# EAGLE board 2 PCB (EAGLE 6.1)
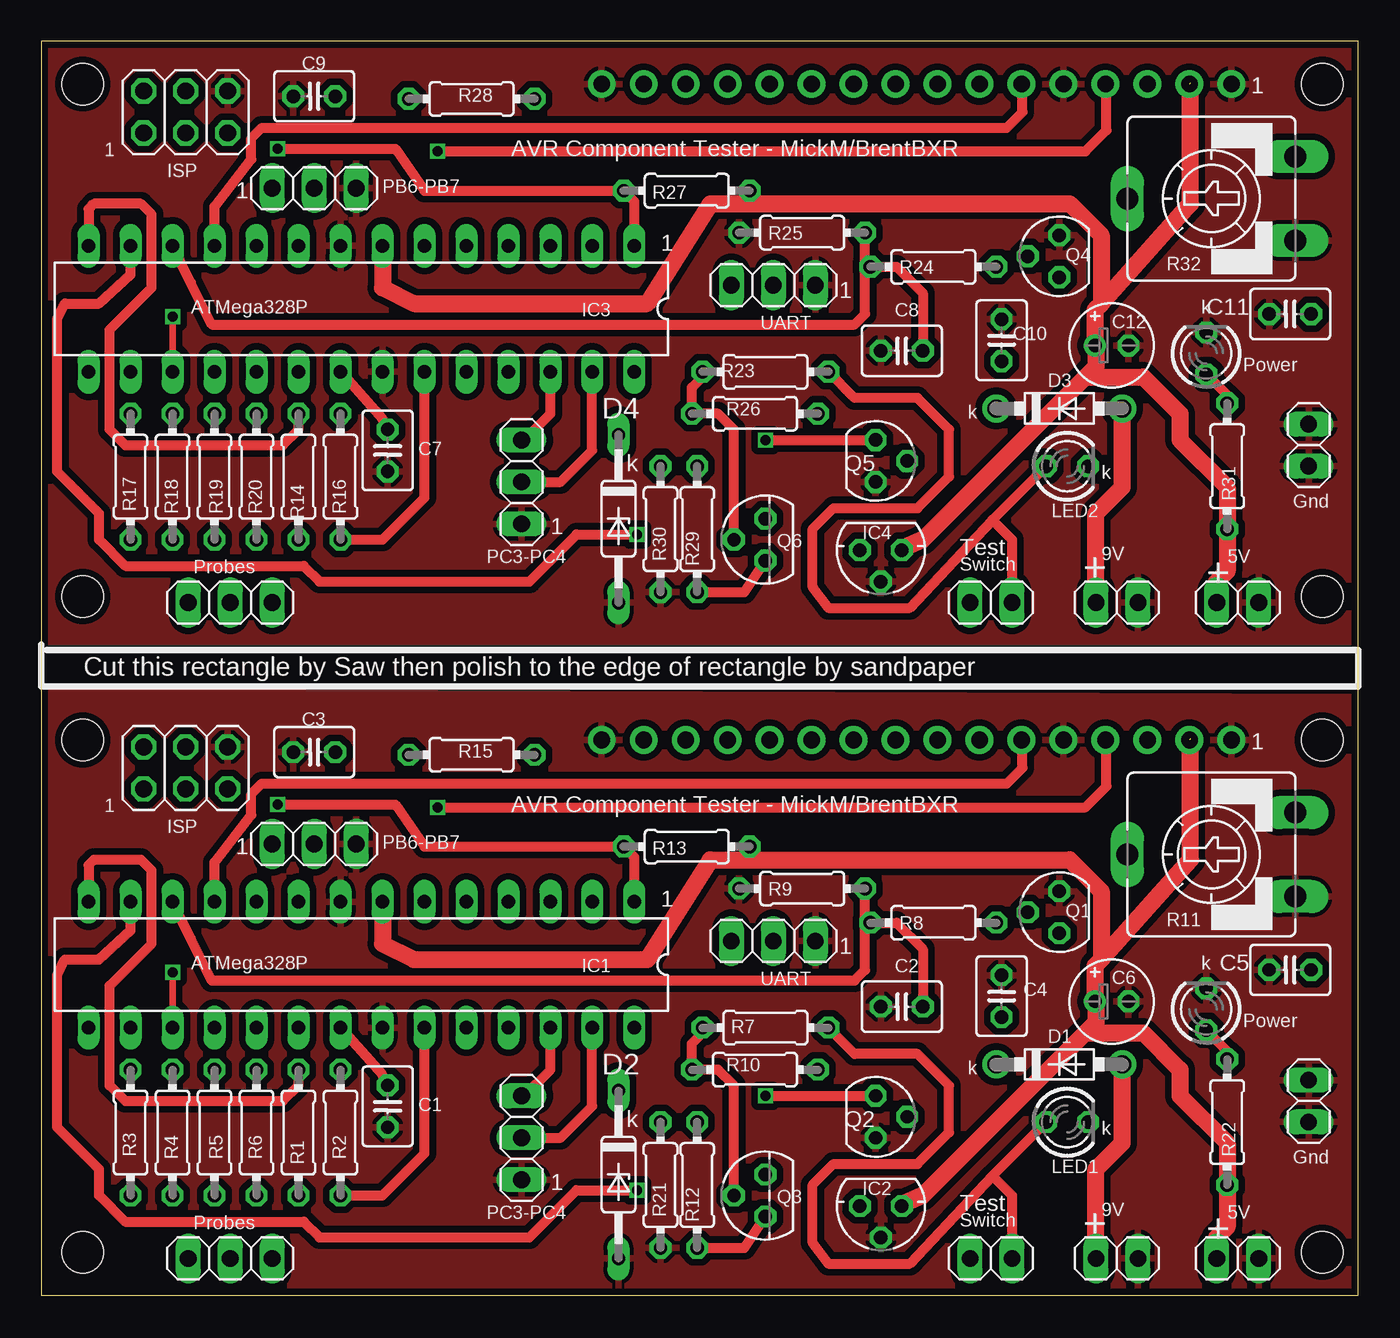
[diagram p0: board, top side]
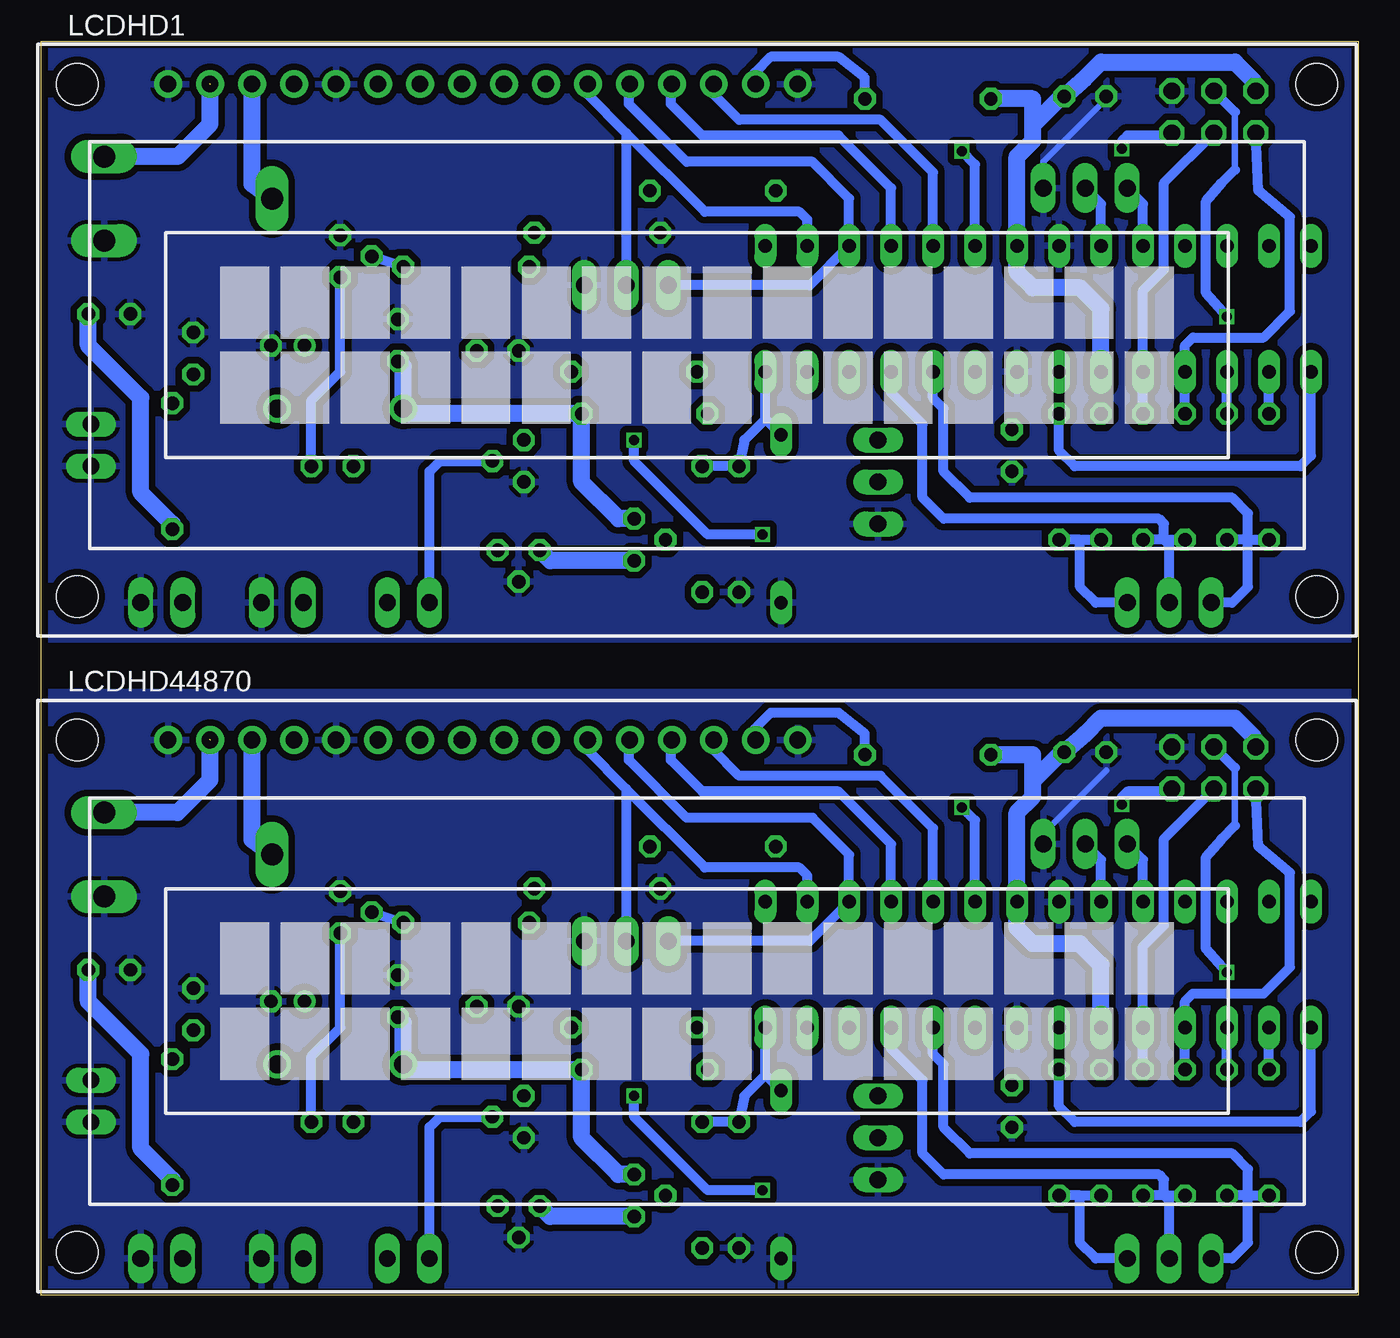
[diagram p1: board, bottom side, seen from below]

Size 79.68 x 75.87 mm. Coordinates in mm from the lower left corner, seen from the top.
Outline: 0,0 79.68,0 79.68,75.87 0,75.87 0,0
Copper layers (1*16): Top 0.035mm / dielectric 1.5mm / Bottom 0.035mm
Design rules: minimum track width 6mil, minimum drill 12mil, track to track 10mil, track to pad 10mil, pad to pad 10mil, via to via 10mil, smd to smd 0mil, copper to edge 10mil, drill to drill 10mil, minimum pad ring 10mil, minimum via ring 6mil, stop-mask expansion 2mil, vias tented up to drill 100mil, thermal gap 10mil

## Footprints (pad centres in the part's own frame; a part is rotated, then mirrored left to right if it is on the bottom)
1X02 = drill 1.016 long: 1 -1.27,0; 2 1.27,0
C025-030X050 = drill 0.813 octagon: 1 -1.27,0; 2 1.27,0
E2-5 = drill 0.813 pad 1.27: + -1.016,0 | drill 0.813 pad 1.27 octagon: - 1.016,0
DO41-7.6 = drill 1.1 pad 1.7: A 3.81,0; C -3.81,0
DO35Z10 = drill 0.813 long: A 5.08,0; C -5.08,0
DIL28-3 = drill 0.813 long: 1 -16.51,-3.81; 2 -13.97,-3.81; 3 -11.43,-3.81; 4 -8.89,-3.81; 5 -6.35,-3.81; 6 -3.81,-3.81; 7 -1.27,-3.81; 8 1.27,-3.81; 9 3.81,-3.81; 10 6.35,-3.81; 11 8.89,-3.81; 12 11.43,-3.81; 13 13.97,-3.81; 14 16.51,-3.81; 15 16.51,3.81; 16 13.97,3.81; 17 11.43,3.81; 18 8.89,3.81; 19 6.35,3.81; 20 3.81,3.81; 21 1.27,3.81; 22 -1.27,3.81; 23 -3.81,3.81; 24 -6.35,3.81; 25 -8.89,3.81; 26 -11.43,3.81; 27 -13.97,3.81; 28 -16.51,3.81
78LXX = drill 0.813 octagon: GND 0,1.905; IN 1.27,0; OUT -1.27,0
2X03 = drill 1.016 octagon: 1 -2.54,-1.27; 2 -2.54,1.27; 3 0,-1.27; 4 0,1.27; 5 2.54,-1.27; 6 2.54,1.27
TUXGR_16X2_R2 = drill 1 pad 1.676: 1 -32,15.5; 2 -29.46,15.5; 3 -26.92,15.5; 4 -24.38,15.5; 5 -21.84,15.5; 6 -19.3,15.5; 7 -16.76,15.5; 8 -14.22,15.5; 9 -11.68,15.5; 10 -9.14,15.5; 11 -6.6,15.5; 12 -4.06,15.5; 13 -1.52,15.5; 14 1.02,15.5; 15 3.56,15.5; 16 6.1,15.5 | hole 2.5: -37.5,-15.5; 37.5,-15.5; -37.5,15.5; 37.5,15.5
LED3MM = drill 0.813 octagon: A -1.27,0; K 1.27,0
1X03 = drill 1.016 long: 1 -2.54,0; 2 0,0; 3 2.54,0
SOT54A = drill 0.813 octagon: B 0,1.905; C -1.27,0; E 1.27,0
TO92 = drill 0.813 octagon: 1 1.27,0; 2 0,1.905; 3 -1.27,0
0204/7 = drill 0.813 octagon: 1 -3.81,0; 2 3.81,0
CA9V = drill 1.321 long: A -2.54,-5.08; E 2.54,-5.08; S 0,5.08

## Placement (x,y rotation side)
9V-DC-IN  [1X02]  65.09,2.22 0 top
9V-DC-IN1  [1X02]  65.09,41.91 0 top
C1  100n  [C025-030X050]  20.96,11.43 270 top
C2  100nF  [C025-030X050]  52.07,17.46 180 top
C3  100n  [C025-030X050]  16.51,32.86 180 top
C4  100n  [C025-030X050]  58.1,18.1 90 top
C5  100n  [C025-030X050]  75.57,19.69 180 top
C6  100uF  [E2-5]  64.77,17.78 0 top
C7  100n  [C025-030X050]  20.96,51.12 270 top
C8  100nF  [C025-030X050]  52.07,57.15 180 top
C9  100n  [C025-030X050]  16.51,72.55 180 top
C10  100n  [C025-030X050]  58.1,57.78 90 top
C11  100n  [C025-030X050]  75.57,59.37 180 top
C12  100uF  [E2-5]  64.77,57.47 0 top
D1  1N5817-B  [DO41-7.6]  61.59,13.97 0 top
D2  5V1  [DO35Z10]  34.92,7.3 270 top
D3  1N5817-B  [DO41-7.6]  61.59,53.66 0 top
D4  5V1  [DO35Z10]  34.92,46.99 270 top
GND  [1X02]  76.68,11.75 90 top
GND1  [1X02]  76.68,51.43 90 top
IC1  MEGA8-P  [DIL28-3]  19.37,20 180 top
IC2  7805L  [78LXX]  50.8,5.4 180 top
IC3  MEGA8-P  [DIL28-3]  19.37,59.69 180 top
IC4  7805L  [78LXX]  50.8,45.09 180 top
ISP  [2X03]  8.73,31.91 0 top
ISP1  [2X03]  8.73,71.6 0 top
LCDHD1  TUXGR_16X2_R2  [TUXGR_16X2_R2]  40,57.78 0 bottom
LCDHD44870  TUXGR_16X2_R2  [TUXGR_16X2_R2]  40,18.1 0 bottom
LED1  LED  [LED3MM]  62.07,10.48 0 top
LED2  LED  [LED3MM]  62.07,50.16 0 top
PB6-PB1  [1X03]  16.51,66.99 0 top
PB6-PB7  [1X03]  16.51,27.31 0 top
PC3-PC1  [1X03]  29.05,49.21 90 top
PC3-PC4  [1X03]  29.05,9.52 90 top
PROBES  [1X03]  11.43,2.22 0 top
PROBES1  [1X03]  11.43,41.91 0 top
PWR  LED  [LED3MM]  70.49,17.3 90 top
PWR1  LED  [LED3MM]  70.49,56.99 90 top
Q1  BC547  [SOT54A]  61.59,23.18 90 top
Q2  BC547  [SOT54A]  50.48,10.79 270 top
Q3  BC557  [TO92]  43.81,6.03 90 top
Q4  BC547  [SOT54A]  61.59,62.86 90 top
Q5  BC547  [SOT54A]  50.48,50.48 270 top
Q6  BC557  [TO92]  43.81,45.72 90 top
R1  750R  [0204/7]  15.56,9.84 270 top
R2  500K  [0204/7]  18.1,9.84 270 top
R3  750R  [0204/7]  5.4,9.84 270 top
R4  500K  [0204/7]  7.94,9.84 270 top
R5  750R  [0204/7]  10.48,9.84 270 top
R6  500K  [0204/7]  13.02,9.84 270 top
R7  27k  [0204/7]  43.81,16.19 180 top
R8  27K  [0204/7]  53.97,22.54 0 top
R9  100K  [0204/7]  46.04,24.61 0 top
R10  33K  [0204/7]  43.18,13.65 0 top
R11  10K  [CA9V]  70.8,26.67 90 top
R12  10K  [0204/7]  39.69,6.67 90 top
R13  10K  [0204/7]  39.05,27.15 180 top
R14  750R  [0204/7]  15.56,49.53 270 top
R15  150R  [0204/7]  26.04,32.7 180 top
R16  500K  [0204/7]  18.1,49.53 270 top
R17  750R  [0204/7]  5.4,49.53 270 top
R18  500K  [0204/7]  7.94,49.53 270 top
R19  750R  [0204/7]  10.48,49.53 270 top
R20  500K  [0204/7]  13.02,49.53 270 top
R21  3K3  [0204/7]  37.46,6.67 270 top
R22  680R  [0204/7]  71.76,10.48 90 top
R23  27k  [0204/7]  43.81,55.88 180 top
R24  27K  [0204/7]  53.97,62.23 0 top
R25  100K  [0204/7]  46.04,64.29 0 top
R26  33K  [0204/7]  43.18,53.34 0 top
R27  10K  [0204/7]  39.05,66.83 180 top
R28  150R  [0204/7]  26.04,72.39 180 top
R29  10K  [0204/7]  39.69,46.35 90 top
R30  3K3  [0204/7]  37.46,46.35 270 top
R31  680R  [0204/7]  71.76,50.16 90 top
R32  10K  [CA9V]  70.8,66.36 90 top
TEST-SWITCH  [1X02]  57.47,2.22 0 top
TEST-SWITCH1  [1X02]  57.47,41.91 0 top
UART  [1X03]  44.29,21.43 180 top
UART1  [1X03]  44.29,61.12 180 top
VCC-GND  [1X02]  72.39,2.22 0 top
VCC-GND1  [1X02]  72.39,41.91 0 top

## Library data of the parts
9V-DC-IN 9V-DC-IN1 GND GND1 ISP ISP1 PB6-PB1 PB6-PB7 PC3-PC1 PC3-PC4 PROBES PROBES1 TEST-SWITCH TEST-SWITCH1 UART UART1 VCC-GND VCC-GND1 = pinhead
C1-C12 R1-R10 R12-R31 = rcl
D1-D4 = diode
IC1 IC3 = atmel; OC_FARNELL: unknown; OC_NEWARK: unknown
IC2 IC4 = v-reg
LCDHD1 LCDHD44870 = display-lcd; OC_FARNELL: unknown; OC_NEWARK: unknown
LED1 LED2 PWR PWR1 = led
Q1 Q2 Q4 Q5 = transistor-small-signal
Q3 Q6 = transistor-pnp
R11 R32 = pot

## Nets
+5V: C3.1 C5.1 C6.+ IC1.7 IC1.20 IC2.OUT ISP.2 LCDHD44870.2 R11.E R13.1 R15.2 R22.1 VCC-GND.1
+5V1: C9.1 C11.1 C12.+ IC3.7 IC3.20 IC4.OUT ISP1.2 LCDHD1.2 R27.1 R28.2 R31.1 R32.E VCC-GND1.1
BAT-MON: D2.C IC1.28 R12.2 R21.1
BAT-MON1: D4.C IC3.28 R29.2 R30.1
GND: 9V-DC-IN.2 C1.2 C2.2 C3.2 C4.2 C5.2 C6.- D2.A GND.1 GND.2 IC1.8 IC1.22 IC2.GND ISP.6 LCDHD44870.1 LCDHD44870.5 LCDHD44870.16 PB6-PB7.3 PC3-PC4.1 PWR.K Q1.E Q2.E R9.1 R11.A R21.2 UART.1 VCC-GND.2
GND1: 9V-DC-IN1.2 C7.2 C8.2 C9.2 C10.2 C11.2 C12.- D4.A GND1.1 GND1.2 IC3.8 IC3.22 IC4.GND ISP1.6 LCDHD1.1 LCDHD1.5 LCDHD1.16 PB6-PB1.3 PC3-PC1.1 PWR1.K Q4.E Q5.E R25.1 R30.2 R32.A UART1.1 VCC-GND1.2
MISO: IC1.18 ISP.1 R5.1
MISO1: IC3.18 ISP1.1 R19.1
MOSI: IC1.17 ISP.4 R4.1
MOSI1: IC3.17 ISP1.4 R18.1
N$1: IC2.IN Q3.3 R12.1
N$2: 9V-DC-IN.1 D1.A
N$3: IC1.23 PROBES.3 R1.2 R2.2
N$4: IC1.13 Q2.C
N$5: IC1.25 PROBES.2 R5.2 R6.2
N$6: IC1.14 R1.1
N$7: IC1.15 R2.1
N$8: IC1.16 R3.1
N$9: PWR.A R22.2
N$10: IC3.23 PROBES1.3 R14.2 R16.2
N$11: IC3.14 R14.1
N$12: Q3.2 R7.2 R10.1
N$13: IC1.6 LCDHD44870.4
N$14: IC3.15 R16.1
N$15: IC1.24 PROBES.1 R3.2 R4.2
N$16: Q1.B R8.2
N$17: IC3.16 R17.1
N$18: IC3.24 PROBES1.1 R17.2 R18.2
N$19: IC1.9 PB6-PB7.2
N$20: LED1.A R7.1 TEST-SWITCH.2
N$21: LED1.K Q1.C
N$22: Q2.B TEST-SWITCH.1
N$23: C2.1 IC1.12 R8.1 R9.2
N$24: IC1.11 LCDHD44870.6
N$25: Q6.2 R23.2 R26.1
N$26: IC1.4 LCDHD44870.13
N$27: IC1.5 LCDHD44870.14
N$28: LCDHD44870.3 R11.S
N$29: C1.1 IC1.21
N$30: IC1.10 PB6-PB7.1
N$31: LCDHD44870.15 R15.1
N$32: Q4.B R24.2
N$33: C4.1 D1.C Q3.1 R10.2
N$34: IC1.26 PC3-PC4.3
N$35: LED2.A R23.1 TEST-SWITCH1.2
N$36: LED2.K Q4.C
N$37: IC1.27 PC3-PC4.2
N$38: Q5.B TEST-SWITCH1.1
N$39: IC3.6 LCDHD1.4
N$40: IC3.4 LCDHD1.13
N$41: IC3.5 LCDHD1.14
N$42: IC3.11 LCDHD1.6
N$43: LCDHD1.15 R28.1
N$44: C10.1 D3.C Q6.1 R26.2
N$45: LCDHD1.3 R32.S
N$46: 9V-DC-IN1.1 D3.A
N$47: C7.1 IC3.21
N$48: C8.1 IC3.12 R24.1 R25.2
N$49: IC4.IN Q6.3 R29.1
N$50: IC3.26 PC3-PC1.3
N$51: IC3.27 PC3-PC1.2
N$52: IC3.9 PB6-PB1.2
N$53: IC3.10 PB6-PB1.1
N$54: IC3.25 PROBES1.2 R19.2 R20.2
N$55: PWR1.A R31.2
N$56: IC3.13 Q5.C
RST: IC1.1 ISP.5 R13.2
RST1: IC3.1 ISP1.5 R27.2
RXD: IC1.2 LCDHD44870.11 UART.2
RXD1: IC3.2 LCDHD1.11 UART1.2
SCK: IC1.19 ISP.3 R6.1
SCK1: IC3.19 ISP1.3 R20.1
TXD: IC1.3 LCDHD44870.12 UART.3
TXD1: IC3.3 LCDHD1.12 UART1.3

## Tracks (layer width: path | path; a pad name or v marks a point on that pad's centre or on a via)
+5V  (1 unrouted)
  Top 0.406: 43.02,26.35 42.86,26.51 | C6.+ 63.82,17.72
  Top 0.61: 42.86,26.51 R13.1
  Top 1.016: IC1.7 20.64,21.27 22.54,20.32 36.67,20.32 40.48,26.35 43.02,26.35 62.23,26.35 64.14,24.45 64.14,20.32 | IC2.OUT 51.91,5.4 53.34,6.03 63.18,15.87 | VCC-GND.1 71.12,3.49 71.75,4.13 R22.1 71.76,9.21 68.9,12.07 68.9,13.65 66.68,15.87 63.18,15.87 | 64.14,20.32 69.53,26.35 69.53,33.65 | 63.18,15.87 63.82,16.51 63.82,17.72 | C6.+ 63.75,19.94 64.14,20.32
  Bottom 0.406: C5.1
  Bottom 0.61: 17.94,32.86 C3.1
  Bottom 1.016: IC1.20 15.56,20 16.83,21.27 19.69,21.27 20.64,22.23 IC1.7 20.64,29.21 19.69,30.16 19.69,31.12 | R15.2 19.69,32.7 19.69,31.12 | ISP.2 6.35,33.81 7.46,34.92 15.56,34.92 16.51,33.97 C3.1 | LCDHD44870.2 69.46,31.18 71.44,29.21 R11.E | C5.1 76.84,17.78 73.66,14.6 73.66,8.89 71.76,6.99 R22.1 | 19.69,31.12 17.94,32.86
+5V1  (1 unrouted)
  Top 0.406: 43.02,66.04 42.86,66.2 | C12.+ 63.82,57.4
  Top 0.61: 42.86,66.2 R27.1
  Top 1.016: IC3.7 20.64,60.96 22.54,60.01 36.67,60.01 40.48,66.04 43.02,66.04 62.23,66.04 64.14,64.14 64.14,60.01 | IC4.OUT 51.91,45.09 53.34,45.72 63.18,55.56 | VCC-GND1.1 71.12,43.18 71.75,43.81 R31.1 71.76,48.89 68.9,51.75 68.9,53.34 66.68,55.56 63.18,55.56 | 64.14,60.01 69.53,66.04 69.53,73.34 | 63.18,55.56 63.82,56.2 63.82,57.4 | C12.+ 63.75,59.63 64.14,60.01
  Bottom 0.406: C11.1
  Bottom 0.61: 17.94,72.55 C9.1
  Bottom 1.016: IC3.20 15.56,59.69 16.83,60.96 19.69,60.96 20.64,61.91 IC3.7 20.64,68.9 19.69,69.85 19.69,70.8 | R28.2 19.69,72.39 19.69,70.8 | ISP1.2 6.35,73.5 7.46,74.61 15.56,74.61 16.51,73.66 C9.1 | LCDHD1.2 69.46,70.87 71.44,68.9 R32.E | C11.1 76.84,57.47 73.66,54.29 73.66,48.58 71.76,46.67 R31.1 | 19.69,70.8 17.94,72.55
BAT-MON
  Bottom 0.61: R12.2 R21.1 37.15,12.07 35.88,13.33 | 35.88,13.33 IC1.28 | D2.C 35.88,13.33
BAT-MON1
  Bottom 0.61: R29.2 R30.1 37.15,51.75 35.88,53.02 | 35.88,53.02 IC3.28 | D4.C 35.88,53.02
GND
  Bottom 0.406: PB6-PB7.3 19.05,27.94 15.24,31.75
  pour Top (isolate 0.406): 0,36.51 80.01,36.2 79.69,-0.16 -0.32,-0.16
  pour Bottom (isolate 0.406): 0.32,36.51 80.01,36.51 80.01,0 0.32,0
GND1
  Bottom 0.406: PB6-PB1.3 19.05,68.58 15.24,72.39 15.24,72.71
  pour Top (isolate 0.406): 0,76.2 80.01,75.88 79.69,39.53 -0.32,39.53
  pour Bottom (isolate 0.406): 0.32,76.2 80.01,76.2 80.01,39.69 0.32,39.69
MISO
  Bottom 0.61: ISP.1 6.03,27.15 4.13,25.56 4.13,19.84 5.71,18.26 10,18.26 10.48,17.78 IC1.18 R5.1
MISO1
  Bottom 0.61: ISP1.1 6.03,66.83 4.13,65.25 4.13,59.53 5.71,57.94 10,57.94 10.48,57.47 IC3.18 R19.1
MOSI  (via drill 0.6)
  Top 0.406: IC1.17 v7.94,19.53
  Bottom 0.406: 7.46,28.42 7.46,31.91 | 8.25,27.62
  Bottom 0.61: v7.94,19.53 9.21,20.96 9.21,26.51 8.25,27.62 7.46,28.42 | 7.46,31.91 ISP.4 | R4.1 IC1.17
MOSI1  (via drill 0.6)
  Top 0.406: IC3.17 v7.94,59.21
  Bottom 0.406: 7.46,68.1 7.46,71.6 | 8.25,67.31
  Bottom 0.61: v7.94,59.21 9.21,60.64 9.21,66.2 8.25,67.31 7.46,68.1 | 7.46,71.6 ISP1.4 | R18.1 IC3.17
N$1
  Top 0.61: R12.1 42.54,2.86 Q3.3
  Bottom 1.016: Q3.3 48.89,4.76 IC2.IN
N$2
  Top 1.016: 9V-DC-IN.1 63.82,7.62 65.4,9.21 D1.A
N$3
  Top 0.61: R2.2 20.64,6.03 23.18,8.57 IC1.23
  Bottom 0.61: 16.83,6.03 R1.2 | 16.83,6.03 R2.2 | PROBES.3 15.87,2.22 16.83,3.18 16.83,6.03
N$4  (via drill 0.6)
  Top 0.61: IC1.13 5.4,22.07 3.49,20.32 1.43,20.32 0.95,19.37 0.95,10.16 3.49,7.62 3.49,6.03 5.08,4.45 15.87,4.45 16.83,3.49 29.53,3.49 32.39,6.35 v36.04,6.35 | v43.82,12.07 Q2.C
  Bottom 0.61: v36.04,6.35 39.37,6.35 43.82,10.8 v43.82,12.07
N$5
  Bottom 0.406: 28.42,15.4 28.42,16.03 IC1.25
  Bottom 0.61: 11.75,6.03 R5.2 | 11.75,6.03 R6.2 | PROBES.2 11.43,5.71 11.75,6.03 | 11.75,6.03 11.75,6.99 12.07,7.3 25.08,7.3 26.35,8.57 26.35,13.02 28.26,14.92 28.26,15.24 28.42,15.4
N$6
  Top 0.61: IC1.14 2.86,26.03 3.18,26.35 6.03,26.35 6.67,25.72 6.67,21.27 4.13,18.73 4.13,12.7 5.08,11.75 14.6,11.75 15.56,12.7 R1.1
N$7
  Bottom 0.406: IC1.15 2.86,12.22
  Bottom 0.61: IC1.15 2.86,11.11 3.49,10.48 17.14,10.48 18.1,11.43 R2.1
N$8
  Bottom 0.61: R3.1 IC1.16
N$9
  Top 0.61: R22.2 71.76,14.76 PWR.A
N$10
  Top 0.61: R16.2 20.64,45.72 23.18,48.26 IC3.23
  Bottom 0.61: 16.83,45.72 R14.2 | 16.83,45.72 R16.2 | PROBES1.3 15.87,41.91 16.83,42.86 16.83,45.72
N$11
  Top 0.61: IC3.14 2.86,65.72 3.18,66.04 6.03,66.04 6.67,65.4 6.67,60.96 4.13,58.42 4.13,52.39 5.08,51.43 14.6,51.43 15.56,52.39 R14.1
N$12
  Top 0.406: 40,15.87 R7.2
  Top 0.61: 40,15.87 39.37,15.24 R10.1 40.96,13.65 41.91,12.7 Q3.2
N$13  (via drill 0.6)
  Top 0.406: 64.45,33.53 LCDHD44870.4
  Top 0.61: v23.97,29.53 63.18,29.53 64.45,30.8 64.45,33.53
  Bottom 0.61: IC1.6 23.18,28.73 v23.97,29.53
N$14
  Bottom 0.406: IC3.15 2.86,51.91
  Bottom 0.61: IC3.15 2.86,50.8 3.49,50.17 17.14,50.17 18.1,51.12 R16.1
N$15
  Bottom 0.61: 6.67,6.03 R3.2 | 6.67,6.03 R4.2 | PROBES.1 7.62,2.22 6.67,3.18 6.67,6.03 | IC1.24 25.72,14.6 25.08,13.97 25.08,10.16 23.49,8.57 7.62,8.57 6.67,7.62 6.67,6.03
N$16
  Bottom 0.61: R8.2 Q1.B
N$17
  Bottom 0.61: R17.1 IC3.16
N$18
  Bottom 0.61: 6.67,45.72 R17.2 | 6.67,45.72 R18.2 | PROBES1.1 7.62,41.91 6.67,42.86 6.67,45.72 | IC3.24 25.72,54.29 25.08,53.66 25.08,49.85 23.49,48.26 7.62,48.26 6.67,47.31 6.67,45.72
N$19
  Bottom 0.406: IC1.9 15.56,24.61
  Bottom 0.61: 15.56,24.61 15.56,26.35 PB6-PB7.2
N$20
  Top 0.61: R7.1 49.21,14.6 53.02,14.6 54.93,12.7 54.93,9.84 53.02,7.94 47.94,7.94 46.67,6.67 46.67,3.18 47.63,1.91 52.55,1.91 57.55,7.22 | 57.55,7.22 LED1.A | TEST-SWITCH.2 58.74,6.03 57.55,7.22
N$21
  Bottom 0.61: LED1.K 63.34,14.45 61.6,16.19 Q1.C
N$22
  Bottom 0.61: Q2.B 55.56,10.8 56.2,10.16 TEST-SWITCH.1
N$23
  Top 0.406: 49.85,22.54 R8.1
  Top 0.61: IC1.12 9.05,21.59 10.32,19.05 49.21,19.05 49.85,19.69 49.85,22.54 R9.2 | C2.1 53.34,20.96 51.75,22.54 R8.1
N$24
  Top 0.406: 59.37,33.53 LCDHD44870.6
  Top 0.61: 59.37,33.53 59.37,31.91 58.42,30.96 13.33,30.96 12.7,30.32 12.7,29.05 10.48,26.19 IC1.11
N$25
  Top 0.406: 40,55.56 R23.2
  Top 0.61: 40,55.56 39.37,54.93 R26.1 40.96,53.34 41.91,52.39 Q6.2
N$26
  Bottom 0.61: IC1.4 28.26,27.3 31.43,30.48 39.69,30.48 41.59,32.39 41.59,33.53 LCDHD44870.13
N$27
  Bottom 0.406: 39.05,33.53 LCDHD44870.14
  Bottom 0.61: IC1.5 25.72,28.26 28.89,31.43 37.46,31.43 39.05,33.02 39.05,33.53
N$28
  Bottom 1.016: LCDHD44870.3 66.93,27.55 R11.S
N$29
  Top 0.61: IC1.21 20.64,13.33 C1.1
N$30
  Bottom 0.61: IC1.10 13.02,26.35 PB6-PB7.1
N$31
  Bottom 0.406: 36.51,34.29 36.51,33.67
  Bottom 0.61: R15.1 29.85,33.97 31.43,35.24 35.56,35.24 36.51,34.29 | 36.51,33.67 LCDHD44870.15
N$32
  Bottom 0.61: R24.2 Q4.B
N$33
  Bottom 0.61: 57.47,13.65 D1.C
  Bottom 1.016: 57.47,13.65 R10.2 46.99,9.52 44.77,7.3 Q3.1 | D1.C 57.78,16.51 C4.1
N$34
  Top 0.61: PC3-PC4.3 29.21,12.06 30.8,13.65 IC1.26
N$35
  Top 0.61: R23.1 49.21,54.29 53.02,54.29 54.93,52.39 54.93,49.53 53.02,47.63 47.94,47.63 46.67,46.35 46.67,42.86 47.63,41.59 52.55,41.59 57.55,46.91 | 57.55,46.91 LED2.A | TEST-SWITCH1.2 58.74,45.72 57.55,46.91
N$36
  Bottom 0.61: LED2.K 63.34,54.13 61.6,55.88 Q4.C
N$37
  Top 0.61: PC3-PC4.2 31.43,9.52 33.34,11.43 IC1.27
N$38
  Bottom 0.61: Q5.B 55.56,50.48 56.2,49.85 TEST-SWITCH1.1
N$39  (via drill 0.6)
  Top 0.406: 64.45,73.22 LCDHD1.4
  Top 0.61: v23.97,69.21 63.18,69.21 64.45,70.48 64.45,73.22
  Bottom 0.61: IC3.6 23.18,68.42 v23.97,69.21
N$40
  Bottom 0.61: IC3.4 28.26,66.99 31.43,70.17 39.69,70.17 41.59,72.07 41.59,73.22 LCDHD1.13
N$41
  Bottom 0.406: 39.05,73.22 LCDHD1.14
  Bottom 0.61: IC3.5 25.72,67.95 28.89,71.12 37.46,71.12 39.05,72.71 39.05,73.22
N$42
  Top 0.406: 59.37,73.22 LCDHD1.6
  Top 0.61: 59.37,73.22 59.37,71.6 58.42,70.64 13.33,70.64 12.7,70.01 12.7,68.74 10.48,65.88 IC3.11
N$43
  Bottom 0.406: 36.51,73.98 36.51,73.35
  Bottom 0.61: R28.1 29.85,73.66 31.43,74.93 35.56,74.93 36.51,73.98 | 36.51,73.35 LCDHD1.15
N$44
  Bottom 0.61: 57.47,53.34 D3.C
  Bottom 1.016: 57.47,53.34 R26.2 46.99,49.21 44.77,46.99 Q6.1 | D3.C 57.78,56.2 C10.1
N$45
  Bottom 1.016: LCDHD1.3 66.93,67.24 R32.S
N$46
  Top 1.016: 9V-DC-IN1.1 63.82,47.31 65.4,48.89 D3.A
N$47
  Top 0.61: IC3.21 20.64,53.02 C7.1
N$48
  Top 0.406: 49.85,62.23 R24.1
  Top 0.61: IC3.12 9.05,61.28 10.32,58.74 49.21,58.74 49.85,59.37 49.85,62.23 R25.2 | C8.1 53.34,60.64 51.75,62.23 R24.1
N$49
  Top 0.61: R29.1 42.54,42.54 Q6.3
  Bottom 1.016: Q6.3 48.89,44.45 IC4.IN
N$50
  Top 0.61: PC3-PC1.3 29.21,51.75 30.8,53.34 IC3.26
N$51
  Top 0.61: PC3-PC1.2 31.43,49.21 33.34,51.12 IC3.27
N$52
  Bottom 0.406: IC3.9 15.56,64.29
  Bottom 0.61: 15.56,64.29 15.56,66.04 PB6-PB1.2
N$53
  Bottom 0.61: IC3.10 13.02,66.04 PB6-PB1.1
N$54
  Bottom 0.406: 28.42,55.09 28.42,55.72 IC3.25
  Bottom 0.61: 11.75,45.72 R19.2 | 11.75,45.72 R20.2 | PROBES1.2 11.43,45.4 11.75,45.72 | 11.75,45.72 11.75,46.67 12.07,46.99 25.08,46.99 26.35,48.26 26.35,52.71 28.26,54.61 28.26,54.93 28.42,55.09
N$55
  Top 0.61: R31.2 71.76,54.45 PWR1.A
N$56  (via drill 0.6)
  Top 0.61: IC3.13 5.4,61.75 3.49,60.01 1.43,60.01 0.95,59.06 0.95,49.85 3.49,47.31 3.49,45.72 5.08,44.13 15.87,44.13 16.83,43.18 29.53,43.18 32.39,46.04 v36.04,46.04 | v43.82,51.75 Q5.C
  Bottom 0.61: v36.04,46.04 39.37,46.04 43.82,50.48 v43.82,51.75
RST  (via drill 0.6)
  Top 0.406: R13.2 35.08,27.15
  Top 0.61: v14.29,29.69 21.43,29.69 23.18,27.15 R13.2 35.88,26.51 IC1.1
  Bottom 0.61: v14.29,29.69 14.29,30.16 13.97,30.48 11.43,30.48 ISP.5
RST1  (via drill 0.6)
  Top 0.406: R27.2 35.08,66.83
  Top 0.61: v14.29,69.37 21.43,69.37 23.18,66.83 R27.2 35.88,66.2 IC3.1
  Bottom 0.61: v14.29,69.37 14.29,69.85 13.97,70.17 11.43,70.17 ISP1.5
RXD
  Bottom 0.406: 46.67,33.53 LCDHD44870.11
  Bottom 0.61: IC1.2 33.34,25.4 33.81,25.88 39.53,25.88 44.29,30.64 | 46.67,33.53 46.67,33.02 44.29,30.64 | 44.29,30.64 UART.2
RXD1
  Bottom 0.406: 46.67,73.22 LCDHD1.11
  Bottom 0.61: IC3.2 33.34,65.09 33.81,65.56 39.53,65.56 44.29,70.33 | 46.67,73.22 46.67,72.71 44.29,70.33 | 44.29,70.33 UART1.2
SCK
  Top 0.61: IC1.19 13.02,15.88
  Bottom 0.61: ISP.3 11.75,27.62 11.75,22.38 13.02,21.11 IC1.19 R6.1
SCK1
  Top 0.61: IC3.19 13.02,55.56
  Bottom 0.61: ISP1.3 11.75,67.31 11.75,62.07 13.02,60.8 IC3.19 R20.1
TXD
  Bottom 0.61: LCDHD44870.12 44.13,33.53 44.13,32.39 40.64,28.89 33.02,28.89 30.8,26.67 IC1.3 33.18,21.43 UART.3
TXD1
  Bottom 0.61: LCDHD1.12 44.13,73.22 44.13,72.07 40.64,68.58 33.02,68.58 30.8,66.36 IC3.3 33.18,61.12 UART1.3

## Text on the board
tPlace: 1 | 1 | AVR Component Tester - MickM/BrentBXR | ISP | 1 | PB6-PB7 | 1 | 1 | ATMega328P | k | UART | Power | k | k | k | Gnd | 1 | PC3-PC4 | Test | 9V | 5V | Probes | Switch | + | + | Cut this rectangle by Saw then polish to the edge of rectangle by sandpaper | 1 | 1 | AVR Component Tester - MickM/BrentBXR | ISP | 1 | PB6-PB7 | 1 | 1 | ATMega328P | k | UART | Power | k | k | k | Gnd | 1 | PC3-PC4 | Test | 9V | 5V | Probes | Switch | + | +